# Altium PCB ESP32_Projet.PcbDoc (part 1 of 2)
Units mm, origin at the board's own origin, x right, y up, seen from the top; angles counter-clockwise.
Board outline 70 x 50 mm, 4 copper layers (Top Layer 1, GND, VCC, Bottom Layer 1), stack 1.573 mm thick; 93 components, 75 nets, 367 pads, 172 vias.
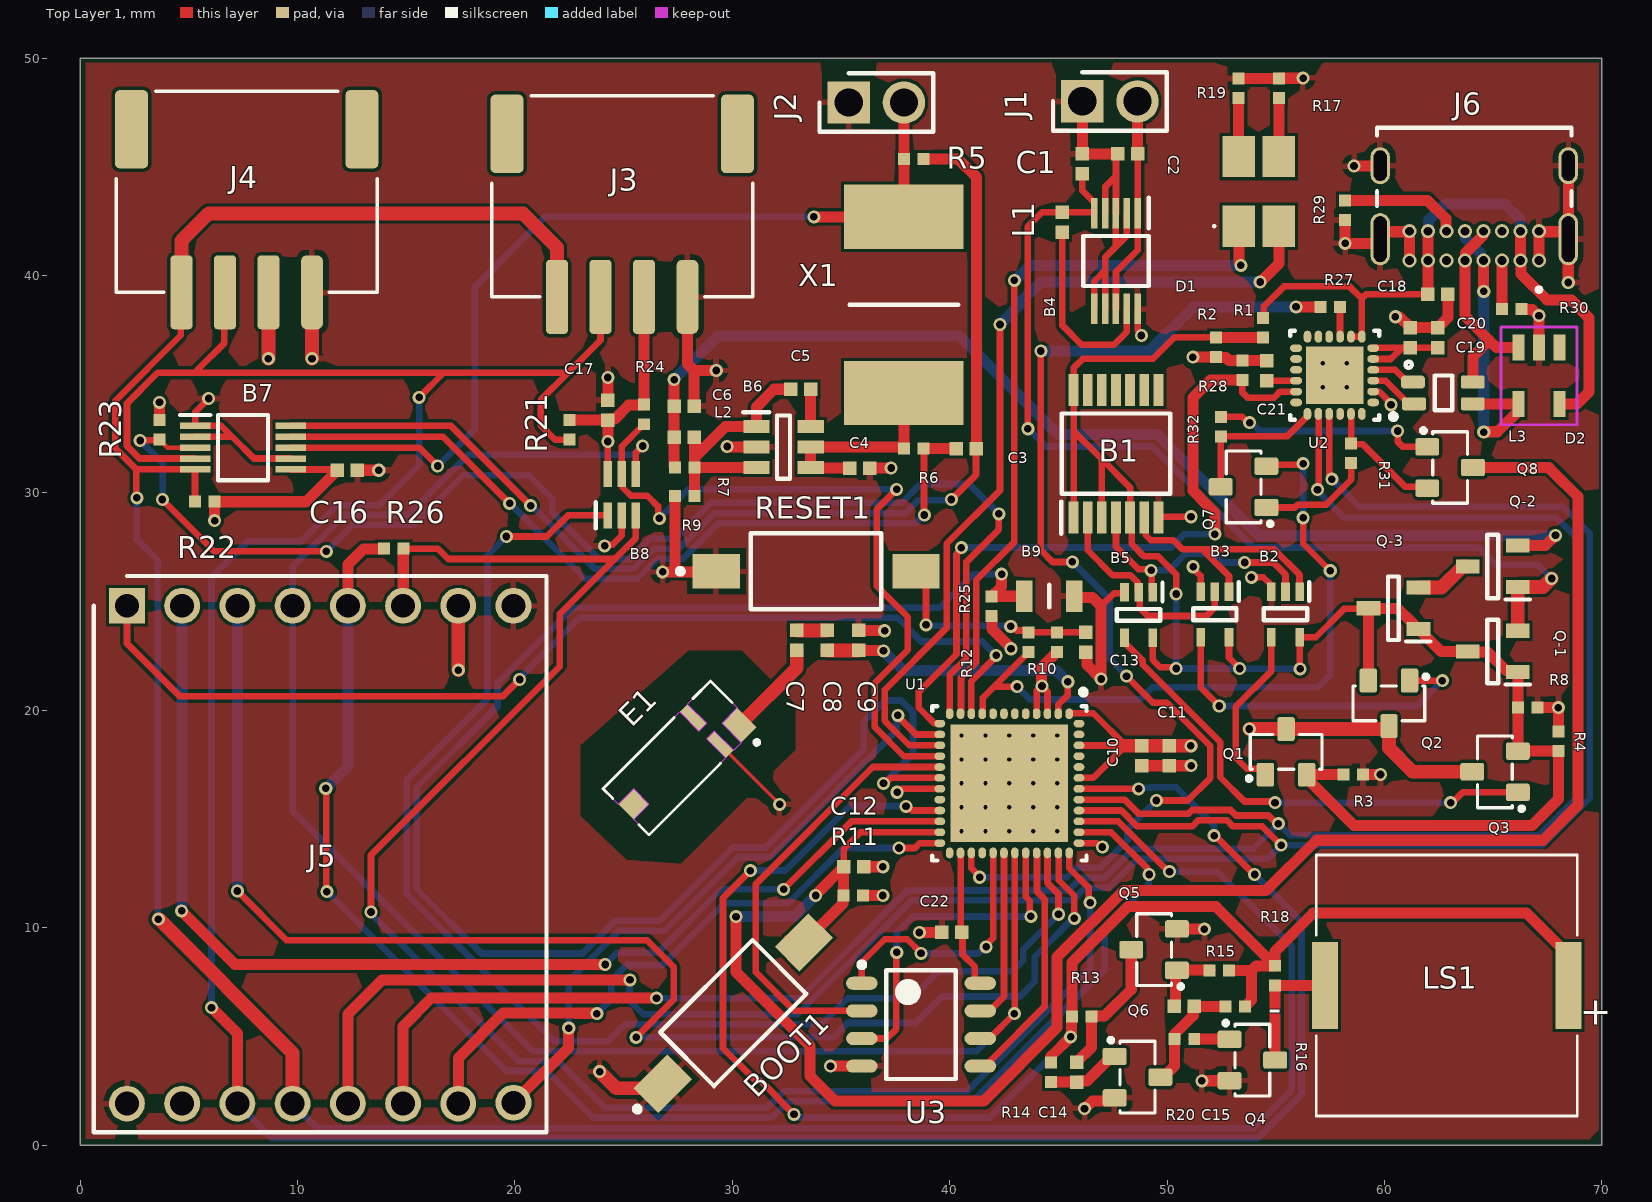
[diagram p0: Top Layer 1 view]
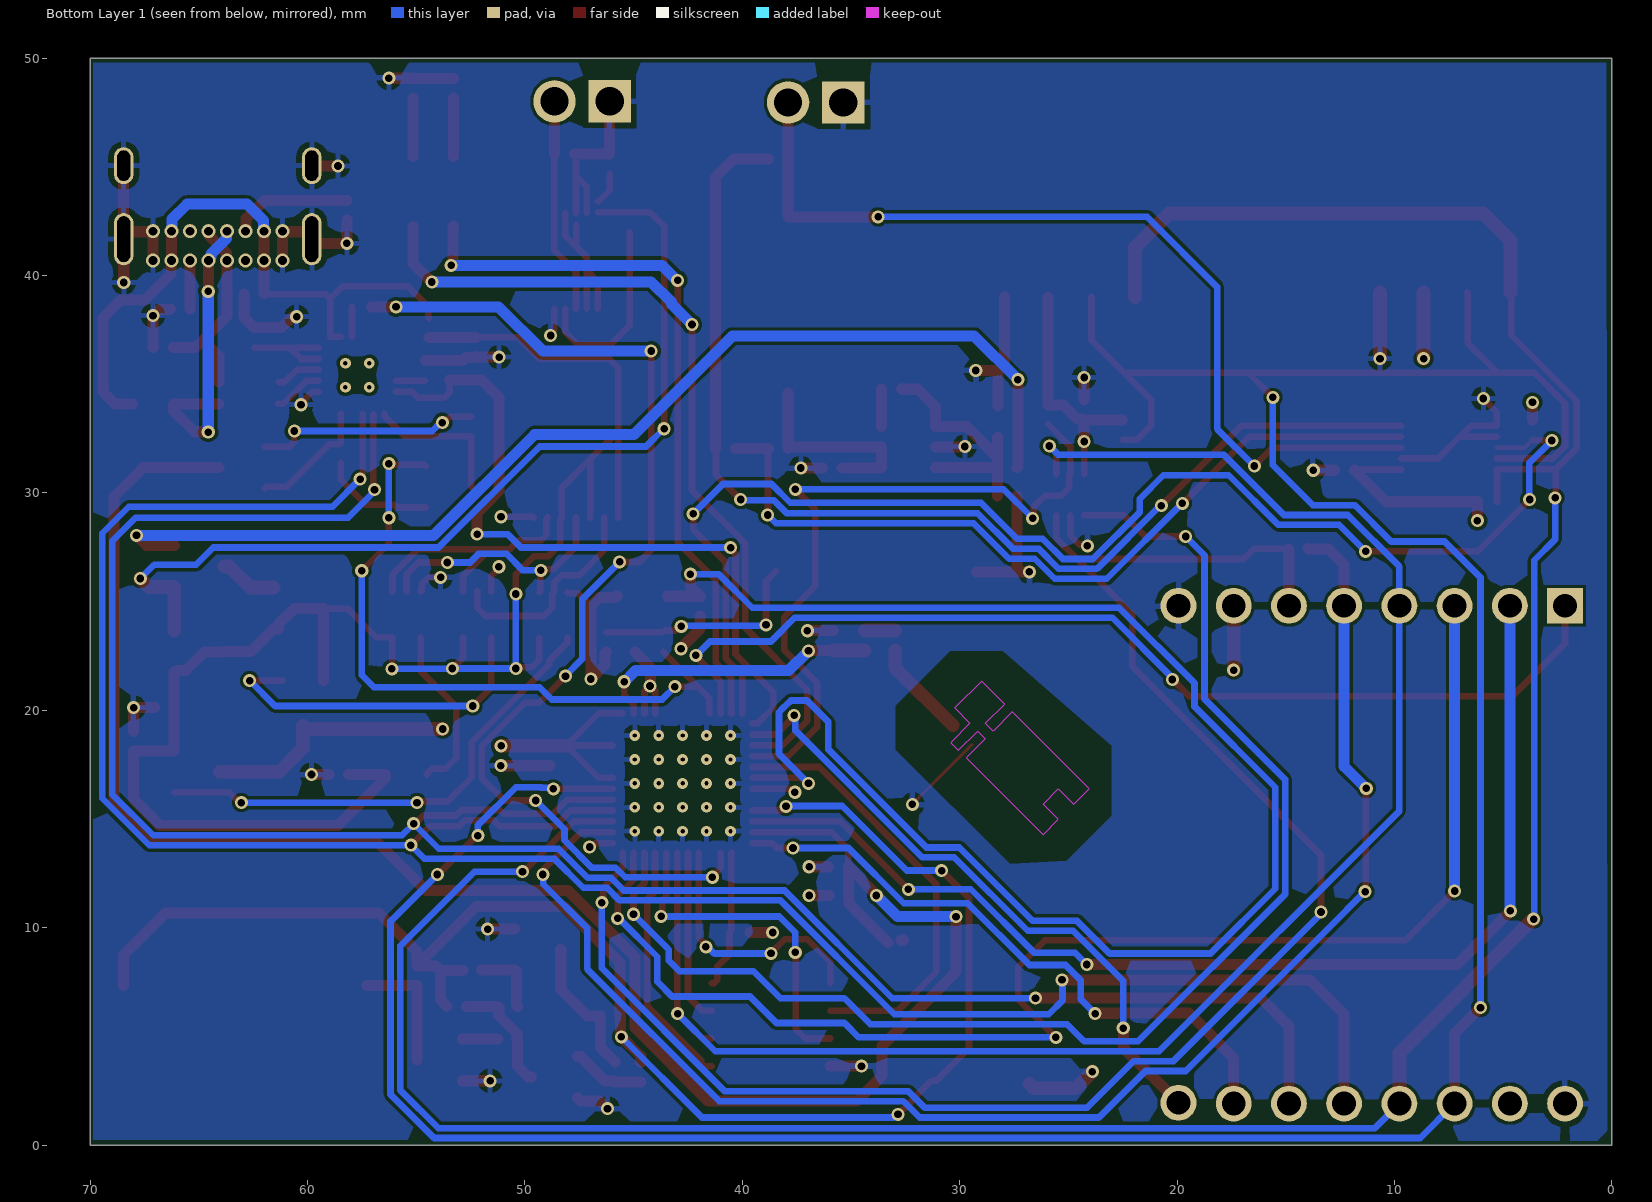
[diagram p1: Bottom Layer 1 view, seen from below]
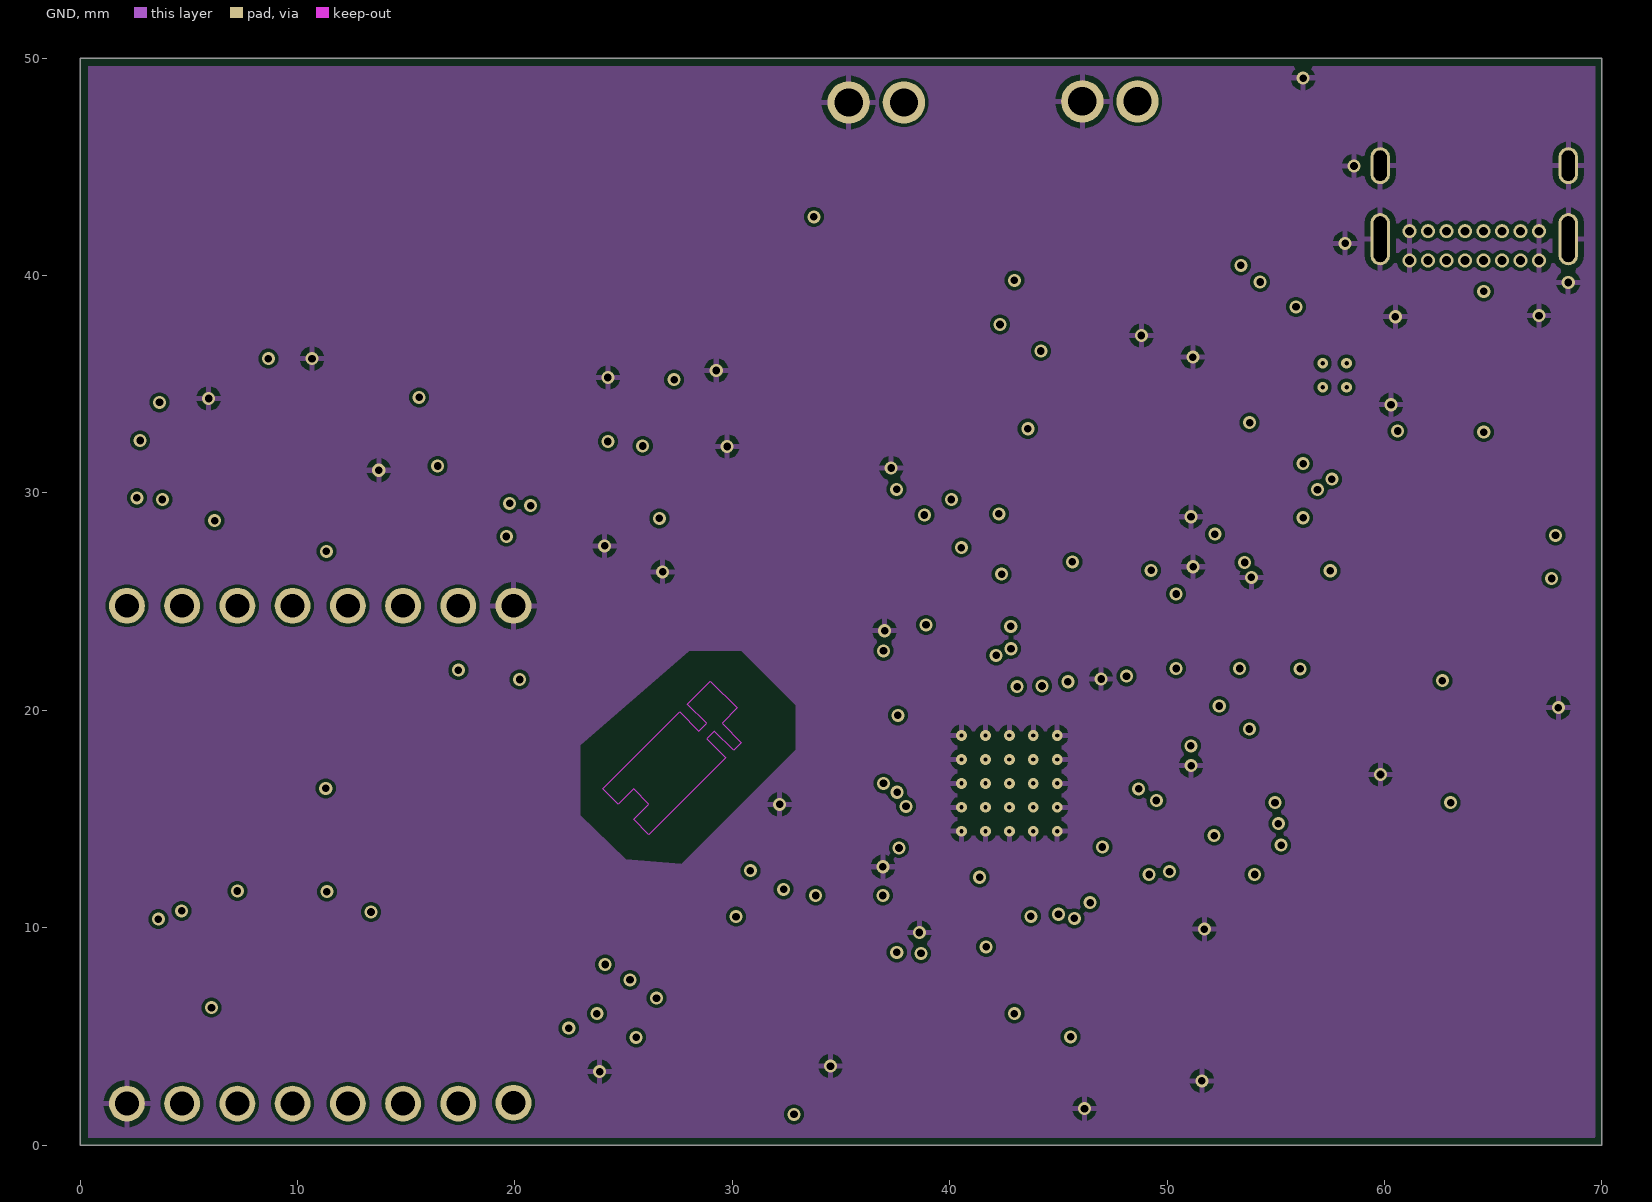
[diagram p2: GND]
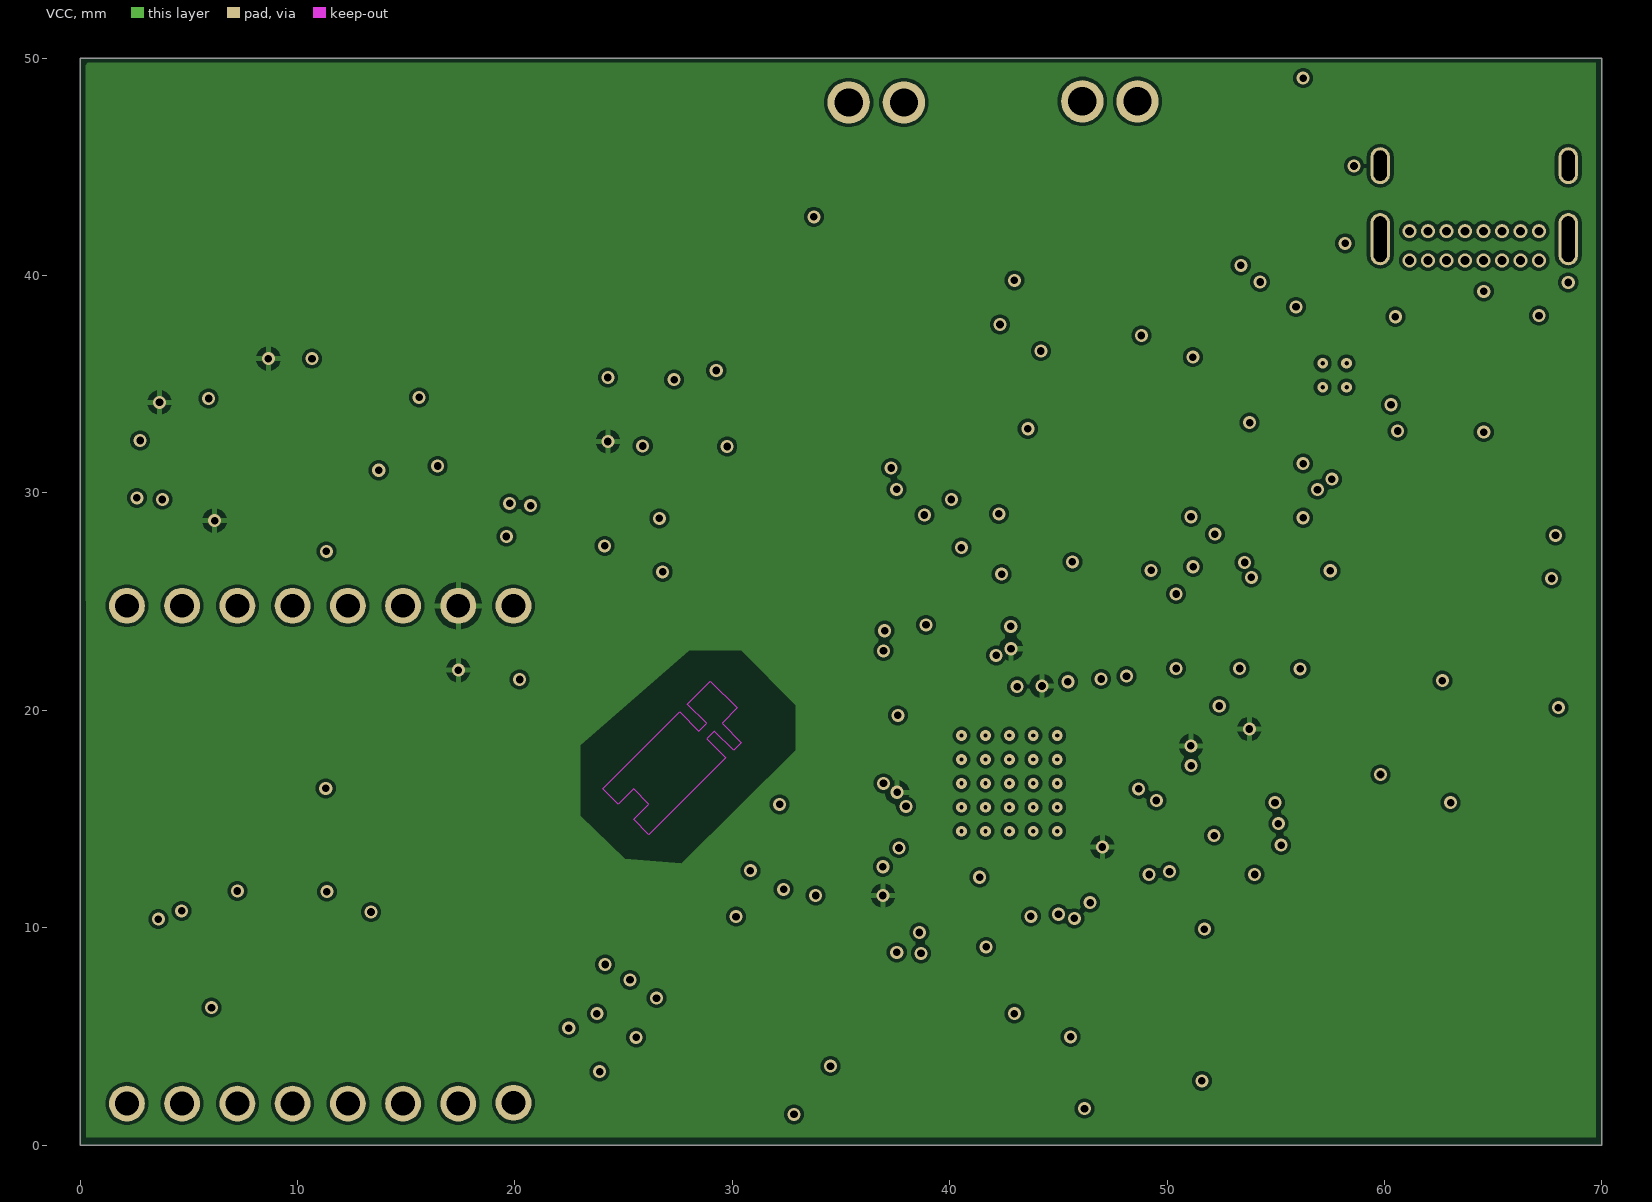
[diagram p3: VCC]

## Layer stack, top to bottom
Top Solder: solder mask 0.0102, Solder Resist, Dk 3.5
Top Layer 1: signal copper 0.035
Dielectric 4: prepreg 0.1803, PP-021, Dk 4.7
Dielectric 2: prepreg 0.1803, PP-021, Dk 4.7
GND: signal copper 0.0356
Dielectric 1: core 0.711, Core-042, Dk 4.8
VCC: signal copper 0.0356
Dielectric 3: prepreg 0.1803, PP-021, Dk 4.7
Dielectric 5: prepreg 0.1803, PP-021, Dk 4.7
Bottom Layer 1: signal copper 0.035
Bottom Solder: solder mask 0.0102, Solder Resist, Dk 3.5

## Board outline
0,0 70,0 70,50 0,50

## Design rules (kind name [scope] priority, off if disabled: settings)
Clearance Clearance_OLTTTPPP [OnOutside] p1: gap=0.15 ignorepadtopadclearanceinfootprint=TRUE
Clearance Clearance_ILTTTPPP [All] p2: gap=0.15 ignorepadtopadclearanceinfootprint=TRUE except(0.2: Arc-Hole Track-Hole SMDPad-Hole THPad-Hole Via-Hole Fill-Hole Poly-Hole Region-Hole)
HoleSize HoleSize_2 [InComponent('U2')] p1: absolutevalues=TRUE maxlimit=1000 minlimit=0.2 maxpercent=80.000 minpercent=20.000
HoleSize HoleSize_1 [InComponent('U1')] p2: absolutevalues=TRUE maxlimit=1000 minlimit=0.2 maxpercent=80.000 minpercent=20.000
HoleSize [All] p3: absolutevalues=TRUE maxlimit=1000 minlimit=0.25 maxpercent=80.000 minpercent=20.000
HoleToHoleClearance HoleToHoleClearance_uVia_same_layer_inner [IsMicroVia and ((StartLayer = 'Inner 1') and (StopLayer = 'Inner 2')) vs IsMicroVia and ((StartLayer = 'Inner 1') and (StopLayer = 'Inner 2'))] p1: gap=0.1 allowstackedmicrovias=FALSE
HoleToHoleClearance HoleToHoleClearance_uVia_same_layer_top [IsMicroVia and ((StartLayer = 'Top Layer') and (StopLayer = 'Inner 1')) vs IsMicroVia and ((StartLayer = 'Top Layer') and (StopLayer = 'Inner 1'))] p2: gap=0.1 allowstackedmicrovias=FALSE
HoleToHoleClearance HoleToHoleClearance_uVia [IsMicroVia vs IsMicroVia] p3: gap=0.01 allowstackedmicrovias=FALSE
HoleToHoleClearance [All] p4: gap=0.1 allowstackedmicrovias=FALSE
MinimumAnnularRing MinimumAnnularRing_uVia [IsMicroVia] p1: minimumring=0.09
MinimumAnnularRing MinimumAnnularRing_OAR [OnOutside] p2: minimumring=0.125
MinimumAnnularRing MinimumAnnularRing_IAR [All] p3: minimumring=0.125
MinimumSolderMaskSliver [All] p1: minsoldermaskwidth=0.051
PolygonConnect [All] p1: connectstyle=Relief reliefconductorwidth=0.254 reliefentries=4 polygonreliefangle="90 Angle" airgapwidth=0.254
RoutingVias RoutingVias_1 [InComponent('U1')] p1: holewidth=0.5 width=1 viastyle="Through Hole" minholewidth=0.5 minwidth=1 maxholewidth=50 maxwidth=60
RoutingVias RoutingVias_uVia [All] p2: holewidth=0.1 width=0.28 viastyle="Through Hole" minholewidth=0.1 minwidth=0.28 maxholewidth=0.1 maxwidth=0.28
RoutingVias [All] p3: holewidth=0.35 width=0.6 viastyle="Through Hole" minholewidth=0.1 minwidth=0.28 maxholewidth=3 maxwidth=3.25
SilkToSilkClearance [InComponent('U1')] p1: silktosilkclearance=0.254
SilkToSolderMaskClearance [IsText vs InComponent('U1')] p1: minsilkscreentomaskgap=0.254 clearancetoexposedcopper=TRUE
SolderMaskExpansion [All] p1: expansion=0 istentingtop=FALSE
SupplyNets "Schematic Supply Nets_2" [InNet('GND')] p1: voltage=0.000
SupplyNets "Schematic Supply Nets_1" [InNet('VBUS')] p2: voltage=0.000
SupplyNets "Schematic Supply Nets" [InNet('3V3')] p3: voltage=0.000
ViasUnderSMD [IsMicroVia] p1: allowed=TRUE
Width Width_ILTW [All] p1: maxlimit=3 minlimit=0.15 preferedwidth=0.15
25 further rules are at their usual default settings.

## Classes and differential pairs
component class UART: C18 C19 C20 C21 D2 J6 L3 Q7 Q8 R27 R28 R29 R30 R31 R32 U2
component class SPI: B8 B9 C17 R24 R25 R26
component class I2C: B7 C16 J3 J4 R21 R22 R23
component class HIM: BOOT1 C12 C13 C14 C15 D1 LS1 Q4 Q5 Q6 R10 R11 R12 R13 R14 R15 R16 R17 R18 R19 R20 RESET1
component class ESP: C10 C11 C22 U1
component class ANTENNE: C7 C8 C9 E1
component class ALIM_MOSFET: B1 B2 B3 B4 B5 B6 C1 C2 C3 C4 C5 C6 J1 J2 L1 L2 Q1 Q2 Q3 Q-1 Q-3 R1 R2 R3 R4 R5 R6 R7 R8 R9 X1

## Components (designator, comment, footprint, x,y, rotation, side; value= is the part's Value field where it differs from the comment)
B1 "74VHC05FT" SOP65P640X120-14N 47.65,31.801 r90 top
B2 "MC74VHC1GT08DFT2G" SOT65P210X110-5N 55.448,24.409 r270 top
B3 "MC74VHC1GT08DFT2G" SOT65P210X110-5N 52.197,24.409 r270 top
B4 "TPS62056DGSG4" SOP50P490X110-10N 47.65,40.665 r270 top
B5 "MC74VHC1GT08DFT2G" SOT65P210X110-5N 48.692,24.384 r270 top
B6 "LMR50410Y3FQDBVRQ1" SOT95P280X145-6N 32.36,32.106 r0 top
B7 "INA237AIDGST" SOP50P490X110-10N 7.497,32.077 r0 top
B8 "TMP126DCKR" SOT65P210X110-6N 24.917,29.911 r90 top
B9 "NB12K00103JBB" RESC2212X50N 44.588,25.248 r0 top
BOOT1 "FSMSM" TECO-FSMSM-2_V 30.048,6.071 r45 top
C1 "22uF" CAPC1005X06N 46.101,45.136 r90 top
C2 "2,2uF" CAPC1005X06N 48.184,45.593 r180 top
C3 "50uF" CAPC1005X06N 40.767,32.029 r180 top
C4 "2,2uF" CAPC1005X06N 35.865,31.14 r0 top
C5 "0,1uF" CAPC1005X06N 33.147,34.773 r0 top
C6 "10uF" CAPC1005X06N 27.788,33.985 r0 top
C7 "0,9pF" CAPC1005X06N 32.971,23.211 r90 top
C8 "0,6pF" CAPC1005X06N 34.368,23.214 r270 top
C9 "1pF" CAPC1005X06N 35.815,23.211 r270 top
C10 "10uF/6.3V(10%)" CAPC1005X06N 48.844,17.91 r90 top
C11 "0.1uF/6.3V(10%)" CAPC1005X06N 50.103,17.903 r90 top
C12 "1uF" CAPC1005X06N 35.585,12.802 r0 top
C13 "1uF" CAPC1005X06N 46.253,23.132 r270 top
C14 "0.01µF" CAPC1005X06N 45.847,3.353 r270 top
C15 "0.01µF" CAPC1005X06N 50.8,6.375 r0 top
C16 "100nF" CAPC1005X06N 12.294,31.039 r0 top
C17 "0.1µF" CAPC1005X06N 24.282,33.807 r90 top
C18 "1.5uF" CAPC1005X06N 61.189,37.135 r90 top
C19 "0.1uF" CAPC1005X06N 62.459,37.135 r90 top
C20 "1uF" CAPC1005X06N 62.459,39.141 r0 top
C21 "4.7uF" CAPC1005X06N 54.585,35.611 r90 top
C22 "100nF" CAPC1005X06N 40.107,9.779 r180 top (schematic designator C?)
D1 "598-8610-207F" 5988610207F 54.218,43.866 r90 top
D2 "824011" 824011 67.107,35.382 r180 top
E1 "NN03-320" XCVR_NN03-320 27.584,17.805 r45 top
J1 "61300211121" 61300211121 46.101,48.006 r0 top
J2 "61300211121" 61300211121 35.357,47.955 r0 top
J3 "114020164" 114020164 24.94,42.814 r180 top
J4 "114020164" 114020164 7.668,43.024 r180 top
J5 "825433-8" Connect-Mikrobus 2.159,24.805 r0 top
J6 "Use" USB4085-GF-A 64.13,45.047 r180 top
L1 "10uF" LQPC1005X06N 42.393,45.24 r90 top
L2 "3,3uH" LQPC1005X06N 24.991,29.769 r180 top
L3 "Filtre en mode commun" 744232090 62.713,34.595 r0 top (schematic designator L?)
LS1 "PKLCS1212E40A1-R1" SPKR_PKLCS1212E40A1-R1 62.865,7.341 r180 top
Q1 "BSS123" BSS123 55.474,18.085 r0 top
Q2 "BSS123" BSS123 60.207,20.32 r180 top
Q3 "BSS123" BSS123 65.083,17.17 r90 top
Q4 "SS8050-G" SS8050-G 53.924,3.912 r270 top
Q5 "SS8050-G" SS8050-G 49.403,8.992 r90 top
Q6 "SS8050-G" SS8050-G 48.641,3.124 r270 top
Q7 "SS8050-G" SS8050-G 53.518,30.277 r90 top
Q8 "SS8050-G" SS8050-G 63.017,31.166 r270 top
Q-1 "FDV304P" SOT95P251X112-3N 64.982,22.708 r180 top (schematic designator "Q -1")
Q-2 "FDV304P" SOT95P251X112-3N 64.982,26.619 r180 top (schematic designator "Q -2")
Q-3 "FDV304P" SOT95P251X112-3N 60.41,24.689 r180 top (schematic designator "Q -3")
R1 "2K" RESC1005X06N 54.407,37.592 r270 top
R2 "1K" RESC1005X06N 52.248,36.703 r270 top
R3 "10K" RESC1005X06N 58.572,17.043 r0 top
R4 "10K" RESC1005X06N 67.996,18.567 r90 top
R5 "50ohm" RESC1005X06N 38.354,45.364 r0 top
R6 "50ohm" RESC1005X06N 38.354,32.029 r0 top
R7 "10K" RESC1005X06N 27.813,31.166 r0 top
R8 "10K" RESC1005X06N 66.582,20.117 r0 top
R9 "90K" RESC1005X06N 27.813,29.845 r180 top
R10 "10kΩ" RESC1005X06N 44.933,23.132 r270 top
R11 "10kΩ" RESC1005X06N 35.56,11.481 r0 top
R12 "0Ω" RESC1005X06N 43.637,23.132 r270 top
R13 "510Ω" RESC1005X06N 46.076,5.918 r180 top
R14 "20kΩ" RESC1005X06N 44.653,3.353 r90 top
R15 "20kΩ" RESC1005X06N 52.4,8.026 r0 top
R16 "510Ω" RESC1005X06N 53.137,6.375 r0 top
R17 "150Ω" RESC1005X06N 55.143,48.616 r270 top
R18 "1kΩ" RESC1005X06N 54.966,7.798 r90 top
R19 "150Ω" RESC1005X06N 53.289,48.616 r270 top
R20 "1kΩ" RESC1005X06N 50.8,4.877 r0 top
R21 "2kΩ" RESC1005X06N 22.504,32.893 r270 top
R22 "2kΩ" RESC1005X06N 5.74,29.591 r180 top
R23 "10kΩ" RESC1005X06N 3.658,32.893 r270 top
R24 "10kΩ" RESC1005X06N 25.933,33.604 r90 top
R25 "10kΩ" RESC1005X06N 41.935,24.79 r90 top
R26 "10kΩ" RESC1005X06N 14.427,27.432 r180 top
R27 "4.7k" RESC1005X06N 57.506,38.557 r0 top
R28 "10k" RESC1005X06N 53.467,35.636 r90 top
R29 "5.1k" RESC1005X06N 58.191,43.002 r270 top
R30 "5.1k" RESC1005X06N 65.862,38.456 r0 top
R31 "10k" RESC1005X06N 58.471,31.826 r270 top
R32 "10k" RESC1005X06N 52.476,33.045 r90 top
RESET1 "FSMSM" TECO-FSMSM-2_V 33.858,26.391 r0 top
U1 "ESP32-PICO-D4" PQFN50P700X700X104_HS-49N 42.748,16.637 r270 top
U2 "CP2104-F03-GM" PQFN50P400X400X80_HS-25N 57.709,35.408 r180 top
U3 "IS66WVS1M8BLL-104NLI" SOIC127P600X175-8N 38.684,5.537 r0 top (schematic designator U?)
X1 "PSR400ITQFF0L50" RESC10052X200N 37.897,38.647 r270 top

## Footprints (in the part's own frame and the unit in brackets; to place one, negate y for a bottom-side part, rotate by r counter-clockwise, add the part's x,y. Pads: shape width x height; smd on the part's side, far side on the other; paste and mask are expansions set on the pad)
824011 [mil] "Suppresseurs ESD / diodes TVS WE-TVS High Speed 5uA 5VDC 2+1"
  rect 21.65x47.24 smd: 1(-37.4,-51.18) 2(0,-51.18) 3(37.4,-51.18) 4(37.4,51.18) 5(-37.5,51)
  Top Layer 1 keep-out lines w5: 68.9,88.58 -68.9,88.58 -68.9,-88.58 68.9,-88.58 68.9,88.58
  body extent -57,-55 57,55, height 57
114020164 [mm]
  rrect50% 1x3.4 smd: 1(-3,3.8)
  rrect30% 1x3.4 smd: 2(-1,3.8) 3(1,3.8) 4(3,3.8)
  rrect26% 1.5x3.6 smd: MP1(-5.3,-3.7) MP2(5.3,-3.7)
  silkscreen extent -6,-5.45 6,3.8, body extent -6.1,-5.59 5.9,4.59, height 5.2
744232090 [mm]
  rrect50% 1.1x0.6 smd: 1(-1.4,0.5)
  rrect33% 1.1x0.6 smd: 2(1.35,0.5) 3(1.35,-0.5) 4(-1.35,-0.5)
  silkscreen extent -1.74,-0.8 0.4,1.44, body extent -1.6,-0.8 1.6,0.8, height 1.8
5988610207F [mm]
  rect 1.9x1.5 smd: 1(-1.6,0.925) 2(1.6,0.925) 3(-1.6,-0.925) 4(1.6,-0.925)
  silkscreen extent -1.65,2 -1.55,2.1, body extent -1.6,-1.35 1.6,1.35, height 0.9
61300211121 [mm] "Embases et logements de câbles WR-PHD 2.54mm 2Pin T HT Header"
  rect 1.95x1.95 / inner round 1.95 / far side rect 1.95x1.95 hole 1.3: 1(0,0)
  round 1.95 hole 1.3: 2(2.54,0)
  silkscreen extent -1.35,-1.35 3.89,1.35
BSS123 [mm]
  rrect25% 0.8x1.1 smd paste+0 mask+0.075: 1(-0.95,-1.05) 2(0.95,-1.05) 3(0,1.05)
  silkscreen extent -1.77,-1.3 1.65,0.8, body extent -1.5,-1.3 1.5,1.3, height 1.1
CAPC1005X06N [mm] "Chip Capacitor, 2-Leads, Body 1,00x0,50mm, IPC Medium Density"
  rect 0.62x0.62 smd: 1(-0.46,0) 2(0.46,0)
  body extent -0.53,-0.28 0.53,0.28, height 0.55
Connect-Mikrobus [mm]
  rect 1.65x1.65 / inner round 1.65 / far side rect 1.65x1.65 hole 1.1: 1(0,0)
  round 1.65 hole 1.1: 2(2.54,0) 3(5.08,0) 4(7.62,0) 5(10.16,0) 6(12.7,0) 7(15.24,0) 8(17.78,0) 9(17.78,-22.86) 10(15.24,-22.9) 11(12.7,-22.9) 12(10.16,-22.9) 13(7.62,-22.9) 14(5.08,-22.9) 15(2.54,-22.9) 16(0,-22.9)
  silkscreen extent -1.52,-24.22 19.3,1.37, body extent -1.37,-24.18 19.14,1.28, height 6.7
LQPC1005X06N [mm]
  rect 0.62x0.62 smd: 1(-3.254,-2.794) 2(-2.334,-2.794)
  body extent -3.32,-3.07 -2.27,-2.52, height 0.55
PQFN50P400X400X80_HS-25N [mm] "PQFN, 24-Leads, Body 4,00x4,00mm, Pitch 0,50mm, Thermal Pad 2,65x2,65mm, IPC Medium Density"
  oval 0.55x0.35 smd: 1(-1.775,1.25) 2(-1.775,0.75) 3(-1.775,0.25) 4(-1.775,-0.25) 5(-1.775,-0.75) 6(-1.775,-1.25) 13(1.775,-1.25) 14(1.775,-0.75) 15(1.775,-0.25) 16(1.775,0.25) 17(1.775,0.75) 18(1.775,1.25)
  oval 0.35x0.55 smd: 7(-1.25,-1.775) 8(-0.75,-1.775) 9(-0.25,-1.775) 10(0.25,-1.775) 11(0.75,-1.775) 12(1.25,-1.775) 19(1.25,1.775) 20(0.75,1.775) 21(0.25,1.775) 22(-0.25,1.775) 23(-0.75,1.775) 24(-1.25,1.775)
  rect 2.65x2.65 smd: 25(0,0)
  silkscreen extent -2.83,-2.05 2.05,2.05, body extent -2.05,-2.05 2.05,2.05, height 0.8
PQFN50P700X700X104_HS-49N [mm] "PQFN, 48-Leads, Body 7,00x7,00mm, Pitch 0,50mm, Thermal Pad 5,40x5,40mm, IPC Medium Density"
  oval 0.5x0.35 smd: 1(-3.2,2.75) 2(-3.2,2.25) 3(-3.2,1.75) 4(-3.2,1.25) 5(-3.2,0.75) 6(-3.2,0.25) 7(-3.2,-0.25) 8(-3.2,-0.75) 9(-3.2,-1.25) 10(-3.2,-1.75) 11(-3.2,-2.25) 12(-3.2,-2.75) 25(3.2,-2.75) 26(3.2,-2.25) 27(3.2,-1.75) 28(3.2,-1.25) 29(3.2,-0.75) 30(3.2,-0.25) 31(3.2,0.25) 32(3.2,0.75) 33(3.2,1.25) 34(3.2,1.75) 35(3.2,2.25) 36(3.2,2.75)
  oval 0.35x0.5 smd: 13(-2.75,-3.2) 14(-2.25,-3.2) 15(-1.75,-3.2) 16(-1.25,-3.2) 17(-0.75,-3.2) 18(-0.25,-3.2) 19(0.25,-3.2) 20(0.75,-3.2) 21(1.25,-3.2) 22(1.75,-3.2) 23(2.25,-3.2) 24(2.75,-3.2) 37(2.75,3.2) 38(2.25,3.2) 39(1.75,3.2) 40(1.25,3.2) 41(0.75,3.2) 42(0.25,3.2) 43(-0.25,3.2) 44(-0.75,3.2) 45(-1.25,3.2) 46(-1.75,3.2) 47(-2.25,3.2) 48(-2.75,3.2)
  rect 5.4x5.4 smd: 49(0,0)
  silkscreen extent -4.32,-3.55 3.55,3.55, body extent -3.55,-3.55 3.55,3.55, height 1.04
RESC1005X06N [mm] "Chip Resistor, 2-Leads, Body 1,00x0,50mm, IPC Medium Density"
  rect 0.55x0.55 smd: 1(-0.45,0) 2(0.45,0)
  body extent -0.53,-0.28 0.53,0.28, height 0.55
RESC2212X50N [mm]
  rect 0.75x1.45 smd: 1(-1.15,0) 2(1.15,0)
  silkscreen extent 0,-0.53 0,0.53, body extent -1.07,-0.63 1.07,0.63, height 0.5
RESC10052X200N [mm]
  rect 2.95x5.5 smd: 1(-4.05,0) 2(4.05,0)
  silkscreen extent 0,-2.5 0,2.5, body extent -5,-2.6 5,2.6, height 2
SOIC127P600X175-8N [mm] "SOIC, 8-Leads, Body 4,90x3,90mm, Pitch 1,27mm, IPC Medium Density"
  oval 1.45x0.6 smd: 1(-2.725,1.905) 2(-2.725,0.635) 3(-2.725,-0.635) 4(-2.725,-1.905) 5(2.725,-1.905) 6(2.725,-0.635) 7(2.725,0.635) 8(2.725,1.905)
  silkscreen extent -2.85,-2.5 1.6,2.88, body extent -3,-2.5 3,2.5, height 1.75
SOP50P490X110-10N [mm]
  rect 1.4x0.3 smd: 1(-2.2,1) 2(-2.2,0.5) 3(-2.2,0) 4(-2.2,-0.5) 5(-2.2,-1) 6(2.2,-1) 7(2.2,-0.5) 8(2.2,0) 9(2.2,0.5) 10(2.2,1)
  silkscreen extent -2.9,-1.5 1.15,1.5, body extent -2.46,-1.5 2.46,1.5, height 1.06
SOP65P640X120-14N [mm]
  rect 1.475x0.45 smd: 1(-2.938,1.95) 2(-2.938,1.3) 3(-2.938,0.65) 4(-2.938,0) 5(-2.938,-0.65) 6(-2.938,-1.3) 7(-2.938,-1.95) 8(2.938,-1.95) 9(2.938,-1.3) 10(2.938,-0.65) 11(2.938,0) 12(2.938,0.65) 13(2.938,1.3) 14(2.938,1.95)
  silkscreen extent -3.67,-2.5 1.85,2.52, body extent -3.1,-2.75 3.3,2.75, height 1.1
SOT65P210X110-5N [mm]
  rect 0.85x0.4 smd: 1(-1.05,0.65) 2(-1.05,0) 3(-1.05,-0.65) 4(1.05,-0.65) 5(1.05,0.65)
  silkscreen extent -1.48,-1 0.28,1.1, body extent -0.95,-1 1.15,1, height 1.1
SOT65P210X110-6N [mm]
  rect 1.2x0.4 smd: 1(-0.95,0.65) 2(-0.95,0) 3(-0.95,-0.65) 4(0.95,-0.65) 5(0.95,0) 6(0.95,0.65)
  silkscreen extent -1.55,1.2 -0.35,1.2, body extent -1.05,-1 1.05,1, height 1
SOT95P251X112-3N [mm]
  rect 1.1x0.65 smd: 1(-1.15,0.95) 2(-1.15,-0.95) 3(1.15,0)
  silkscreen extent -1.7,-1.46 0.25,1.53, body extent -1.25,-1.46 1.25,1.46, height 1.12
SOT95P280X145-6N [mm]
  rect 1.2x0.6 smd: 1(-1.25,0.95) 2(-1.25,0) 3(-1.25,-0.95) 4(1.25,-0.95) 5(1.25,0) 6(1.25,0.95)
  silkscreen extent -1.85,-1.45 0.3,1.6, body extent -1.4,-1.45 1.4,1.45, height 1.2
SPKR_PKLCS1212E40A1-R1 [mm]
  rect 1.2x4 smd: N(5.6,0) P(-5.6,0)
  silkscreen extent -6,-6 6,6, body extent -6,-6 6,6, height 3
SS8050-G [mm]
  rrect25% 0.8x1.1 smd paste+0 mask+0.075: 1(-0.95,-1.05) 2(0.95,-1.05) 3(0,1.05)
  silkscreen extent -1.77,-1.3 1.65,0.8, body extent -1.5,-1.3 1.5,1.3, height 1.1
TECO-FSMSM-2_V [mm] "SMD, 2-Leads, Body 6x3.5mm, Pitch 9.19mm"
  rect 2.2x1.6 smd: 1(-4.595,0)
  rect 2.18x1.6 smd: 2(4.595,0)
  silkscreen extent -6.37,-1.75 3,1.75, body extent -4.98,-1.75 4.98,1.75, height 4.4
USB4085-GF-A [mm]
  round 0.65 hole 0.4: A1(-2.975,4.36) A4(-2.125,4.36) A5(-1.275,4.36) A6(-0.425,4.36) A7(0.425,4.36) A8(1.275,4.36) A9(2.125,4.36) A12(2.975,4.36) B1(2.975,3.01) B4(2.125,3.01) B5(1.275,3.01) B6(0.425,3.01) B7(-0.425,3.01) B8(-1.275,3.01) B9(-2.125,3.01) B12(-2.975,3.01)
  oval 0.9x1.7 hole 0.6 slot 1.4 at 90 deg: S1(-4.325,0) S2(4.325,0)
  oval 0.9x2.4 hole 0.6 slot 2.1 at 90 deg: S3(-4.325,3.38) S4(4.325,3.38)
  silkscreen extent -4.47,-1.74 4.47,5.8, body extent -4.47,-4.25 4.47,4.92, height 3.46
XCVR_NN03-320 [mm]
  rect 1x1 smd: 1(-3,0)
  rect 0.5x1.25 smd: 2(1.75,-0.875) 4(1.75,0.875)
  rect 1x1.25 smd: 3(3,-0.875)
  Keep-Out Layer region: 3.5,-0.25 2.5,-0.25 2.5,-1.5 2,-1.5 2,-0.25 1.5,-0.25 1.5,-1.5 -3.5,-1.5 -3.5,-0.5 -2.5,-0.5 -2.5,0.5 -3.5,0.5 -3.5,1.5 1.5,1.5 1.5,0.25 2,0.25 2,1.5 3.5,1.5
  silkscreen extent -3.5,-2.1 3.5,1.5, body extent -3.5,-1.5 3.5,1.5, height 2.02

## Part data
B1: "Logic Gates CMOS LOGIC IC INVERTER", Manufacturer_Name=Toshiba, Mouser Part Number=757-74VHC05FT, Manufacturer_Part_Number=74VHC05FT
B2 B3 B5: "Single 2-Input AND Gate, TTL Level", Manufacturer_Name=onsemi, Manufacturer_Part_Number=MC74VHC1GT08DFT2G
B4: "TEXAS INSTRUMENTS - TPS62056DGSG4 - Synchronous Buck (Step Down) Switching Regulator, Fixed, 2.7V-10Vin, 3.3V/0.8A out, 850kHz, VSSOP-10", Manufacturer_Name="Texas Instruments", Mouser Part Number=595-TPS62056DGSG4, Manufacturer_Part_Number=TPS62056DGSG4
B6: "Régulateurs de tension de commutation Automotive qualified SIMPLE SWITCHER 4-V to 36-V, 1-A synchronous step-down converter 6-SOT-23 -40 to 150", Manufacturer_Name="Texas Instruments", Mouser Part Number=595-R50410Y3FQDBVRQ1, Manufacturer_Part_Number=LMR50410Y3FQDBVRQ1
B7: "Current Sense Amplifiers 85-V, 16-bit, I2C output current/voltage/power monitor with alert 10-VSSOP -40 to 125", Manufacturer_Name="Texas Instruments", Mouser Part Number=595-INA237AIDGST, Manufacturer_Part_Number=INA237AIDGST
B8: "Board Mount Temperature Sensors +/-0.25 C SPI temperature sensor with 175 C operation, CRC and slew-rate alert", Manufacturer_Name="Texas Instruments", Mouser Part Number=595-TMP126DCKR, Manufacturer_Part_Number=TMP126DCKR
B9: "NTC SMD Thermistor, NB12K, 10K, 5% AVX 10k 0805 Protection NTC Thermistor, 5s, 2 x 1.25 x 1.3mm", Manufacturer_Name="Kyocera AVX", Mouser Part Number=581-NB12K00103JBB, Arrow Part Number=NB12K00103JBB, Arrow Price/Stock=https://www.arrow.com/en/products/nb12k00103jbb/avx, Datasheet Link=https://datasheet.datasheetarchive.com/originals/distributors/Datasheets-DGA6/551314.pdf, Geometry.Height=0.5mm, Manufacturer_Part_Number=NB12K00103JBB, Mouser Price/Stock=https://www.mouser.co.uk/ProductDetail/AVX/NB12K00103JBB/?qs=4%252B6%252BTdINQeDPvI%252BQUQjJ3Q%3D%3D
BOOT1 RESET1: library part CMP-2000-07511-1, "FSMSM Push Button Switch, 50 mA, -35 to 85 degC, 2-Pin SMD, RoHS, Bulk", Case\/Package=SMD/SMT, Contact Current Rating=50mA, Contact Resistance=100mOhm, Manufacturer="TE Connectivity", Max Operating Temperature=85degC, Max Voltage Rating (DC)=12V, Min Operating Temperature=-35degC, Operating Force=180gf, Package Description="2-Pin Surface Mount Device, Body 6 x 3.5 mm, Pitch 9.19 mm", Package Quantity=1000, Voltage Rating (DC)=24V, Actuator Length=1.07mm, Actuator Material=Polyamide, Contact Material=Brass, Contact Plating=Silver, Current Rating=50mA, Datasheet URL=http://www.te.com/commerce/DocumentDelivery/DDEController?Action=showdoc&DocId=Customer+Drawing%7F1437566-3%7FC2%7Fpdf%7FEnglish%7FENG_CD_1437566-3_C2_1437566_3_1_c.dwg.pdf%7F1437566-3, Datasheet Version="Rev. C2, 08/2014", Electrical Life=20000Cycles, ELV=Compliant, Illumination Type=Illuminated, Lead Free=LeadFree, Manufacturer URL=http://www.te.com/, Mechanical Life=20000Cycles, Mount=SurfaceMount, Mounting Technology=SurfaceMount, Orientation=Straight, Package Reference=FSMSM, Packaging=LoosePiece, REACH SVHC=Unknown, RoHSCompliant=true, Switch Travel=0.25mm, Termination=GullWing, Throw Configuration=SPST
C1 C2 C3 C4 C5 C6 C7 C8 C9 C10 C11 C12 C13 C14 C15 C16 C17 C18 C19 C20 C21 C22: library part Capacitor
D1: "Standard LEDs - SMD Red/Green WC 80/50mcd 645/570nm", Manufacturer_Name=Dialight, Mouser Part Number=645-598-8610-207F, Arrow Part Number=598-8610-207F, Arrow Price/Stock=https://www.arrow.com/en/products/598-8610-207f/dialight?region=nac, Datasheet Link=https://media.digikey.com/pdf/Data%20Sheets/Dialight%20PDFs/598%20Series%201210%20Pkg%20Bi-Color.pdf, Geometry.Height=0.8mm, Manufacturer_Part_Number=598-8610-207F, Mouser Price/Stock=https://www.mouser.co.uk/ProductDetail/Dialight/598-8610-207F?qs=7JStj%2FjQ2SFuCjosqwklHQ%3D%3D
D2: "TVS Diode Array WE-TVS, High Speed Series  - Low capazity - No leakage current - Low clamping voltage - high ESD voltage protection  -- USB 1.0 - 2.0"
E1: "Dual port antenna booster for GNSS, Bluetooth, 5G and UWB (1561 - 1606MHz, 2400 - 2500MHz, 3400 - 3800MHz, 3100 - 4800MHz and 6000 - 10600 MHz), signal booster", Manufacturer_Name=Ignion, Mouser Part Number=128-NN03-320, Manufacturer_Part_Number=NN03-320
J1 J2: "WURTH ELEKTRONIK - 61300211121 - HEADER, 2.54MM, PIN, THT, VERTICAL, 2WAY"
J3 J4: "Seeed Studio Accessories Grove Female Header - SMD-4P-2.0mm-90D-20Pcs", Manufacturer_Name="Seeed Studio", Mouser Part Number=713-114020164, Manufacturer_Part_Number=114020164
J5: library part Connect-Mikrobus, "Headers & Wire Housings 8P double for connection mikrobus", Manufacturer_Name="TE Connectivity", Mouser Part Number=571-825433-8, Manufacturer_Part_Number=825433-8
J6: library part USB4085-GF-A, "Connecteurs USB USB Type C, 2.0, Rec, TH , G/F, RA , Top Mnt, T & R"
L1 L2: library part Bobine
L3: library part 744232090, "Bobines / filtres en mode commun WE-CNSW 1206 370mA 90Ohm 100MHz AECQ200"
LS1: "Buzzers Transducer, Externally Driven Piezo 1.5V 2kHz 70dB @ 1.5V, 10cm Surface Mount Solder Pads", Package=None, Availability=Unavailable, MF="Murata Electronics", MP=PKLCS1212E40A1-R1, Price=None
Q1 Q2 Q3: "BSS123 N-Channel MOSFET, 170 mA, 100 V PowerTrench, 3-Pin SOT-23 ON Semiconductor"
Q4 Q5 Q6 Q7 Q8: "Bipolar Transistors - BJT NPN TRANSISTOR 1.5A 40V"
Q-1 Q-2 Q-3: "ON SEMICONDUCTOR - FDV304P - Power MOSFET, P Channel, 25 V, 460 mA, 1.22 ohm, SOT-23, Surface Mount", Manufacturer_Name=onsemi, Mouser Part Number=512-FDV304P, Arrow Part Number=FDV304P, Arrow Price/Stock=https://www.arrow.com/en/products/fdv304p/on-semiconductor?utm_currency=USD&region=europe, Datasheet Link=https://componentsearchengine.com/Datasheets/2/FDV304P.pdf, Geometry.Height=1.12mm, Manufacturer_Part_Number=FDV304P, Mouser Price/Stock=https://www.mouser.co.uk/ProductDetail/onsemi-Fairchild/FDV304P?qs=FOlmdCx%252BAA1BAlCQZu888w%3D%3D
R1 R2 R3 R4 R5 R6 R7 R8 R9 R10 R11 R12 R13 R14 R15 R16 R17 R18 R19 R20 R21 R22 R23 R24 R25 R26 R27 R28 R29 R30 R31 R32: library part Resistor
U1: library part ESP32, "Système RF sur puce - SoC SIP module ESP32 with 4MByte Flash, Dual Core MCU, Wi-Fi & Bluetooth Combo, LGA48-pin, 7*7mm", Manufacturer 1="Espressif Systems", Supplier Part Number 1=1904-1029-1-ND, Manufacturer Part Number 1=ESP32-PICO-D4, Supplier 1=Digi-Key
U2: library part USBBridge, "USB Bridge, USB to UART USB 2.0 UART Interface 24-QFN (4x4)", Manufacturer 1="Silicon Labs", Manufacturer Part Number 1=CP2104-F03-GM, Supplier 1="Arrow Electronics", Supplier Part Number 1=CP2104-F03-GM
U3: library part SRAM, "SRAM 8Mb, SerialRAM, 2.7V-3.6V, 104MHz, 8 pin SOIC 150 mil, RoHS", Manufacturer 1=ISSI, Supplier Part Number 1=706-IS66WVS1M8BLL-104NLI-ND, Manufactuer Part Number 1=IS66WVS1M8BLL-104NLI, Supplier 1=Digi-Key
X1: "ROHM - PSR400ITQFF0L50 - SMD Current Sense Resistor, 500 ohm, PSR Series, 3921 [1052 Metric], 4 W, +/- 1%, Metal Strip", Manufacturer_Name="ROHM Semiconductor", Mouser Part Number=755-PSR400ITQFF0L50, Datasheet Link=https://componentsearchengine.com/Datasheets/2/PSR400ITQFF0L50.pdf, Geometry.Height=2mm, Manufacturer_Part_Number=PSR400ITQFF0L50, Mouser Price/Stock=https://www.mouser.co.uk/ProductDetail/ROHM-Semiconductor/PSR400ITQFF0L50?qs=493kPxzlxfLaT1w5Mo%252BtHg%3D%3D

## Via types
v1: diameter 0.6, hole 0.35, Top Layer 1 to Bottom Layer 1, 143 vias
v2: diameter 0.5, hole 0.2, Top Layer 1 to Bottom Layer 1, 29 vias

## Nets (pads, with @x,y where several pads share a name; then routed paths per layer and width w, separated by ;. In a path a pad name is that pad's centre, name@x,y a point inside that pad or via, vN(x,y) a via of type N, cw(c..) or ccw(c..) an arc to the next point about the centre after c; other vN are vias at no path point)
3V3: B7.6 B8.6 C10.2 C11.2 C16.1 C17.1 J3.2 J4.2 J5.7 Q1.3 Q2.3 Q3.3 R10.2 R11.2 R21.1 R22.1 R23.1 R24.2 R25.1 U1.1 U1.3 U1.4 U1.19 U1.37 U1.43 U1.46 | length 61.2
  Top Layer 1 w0.305: B7.6@9.697,31.077 9.699,31.075 11.797,31.075 C16.1@11.834,31.039 ; B8.6@24.267,30.861 B8.6@24.275,30.869 ; B8.6@24.275,31.254 B8.6@24.275,30.869 ; C17.1@24.275,33.34 C17.1@24.282,33.347 ; v1(24.282,32.36) 24.275,32.352 B8.6@24.275,30.869 ; v1@37.599,16.235 37.672,16.235 37.825,16.387 U1.19@39.548,16.387 ; U1.4@43.998,19.837 43.998,20.884 v1@44.247,21.133 ; v1(44.247,21.115) 44.503,20.858 44.503,19.842 U1.3@44.498,19.837 ; U1.1@45.498,19.837 45.498,19.844 45.519,19.864 46.602,19.864 48.088,18.378 U1.46@45.957,18.378 ; U1.37@45.948,13.887 46.765,13.887 46.941,13.71 v1(47.021,13.71) ; U1.43@45.948,16.887 45.957,16.896 46.614,16.896 48.088,18.37
  Top Layer 1 w0.508: R23.1@3.658,33.343 v1(3.658,34.163) ; v1(6.193,28.718) v1(6.193,28.718) 6.192,29.59 R22.1@6.19,29.591 10.386,29.591 C16.1@11.834,31.039 ; R21.1@22.504,33.343 22.507,33.345 24.28,33.345 C17.1@24.282,33.347 ; v1(24.282,32.36) C17.1@24.282,33.347 ; J3.2@25.94,39.014 25.937,39.011 25.937,34.058 R24.2@25.933,34.054 25.912,34.033 25.24,34.033 24.61,33.403 24.338,33.403 C17.1@24.282,33.347 ; R11.2@36.01,11.481 v1(36.932,11.481) ; R25.1@41.935,24.34 41.942,24.334 41.942,23.735 42.823,22.854 v1(42.823,22.829) ; v1(44.247,21.115) 44.247,21.139 44.221,21.165 44.221,21.971 R10.2@44.933,22.682
  Top Layer 1 w0.635: v1(8.661,36.17) 8.668,36.176 J4.2@8.668,39.224 ; v1(17.399,21.844) J5.7@17.399,24.805 ; 48.088,18.37 C10.2@48.844,18.37 ; C10.2@48.851,18.363 C11.2@50.103,18.363 v1(51.099,18.363) ; v1(53.782,19.135) Q1.3@55.474,19.135 60.124,19.135 60.207,19.217 Q2.3@60.207,19.27 60.207,18.254 61.29,17.17 Q3.3@64.033,17.17
  other v1: 37.585,16.227
GND: B1.7 B2.3 B3.3 B4.2 B4.3 B4.4 B4.6 B4.7 B4.10 B5.3 B6.2 B7.1 B7.2 B7.7 B8.2 B9.2 BOOT1.1 C1.2 C2.2 C4.2 C6.2 C9.1 C10.1 C11.1 C12.2 C13.2 C16.2 C17.2 C18.2 C19.2 C20.2 C21.2 C22.2 D2.2 E1.2 J1.1 J2.1 J3.1 J4.1 J5.8 J5.16 J6.A1 J6.A12 J6.B1 J6.B12 J6.S1 J6.S2 J6.S3 J6.S4 Q4.2 Q5.2 Q6.2 R2.2 R3.2 R4.2 R8.2 R9.2 R17.1 R19.1 R28.2 R29.2 R30.2 RESET1.1 U1.49 U2.2 U3.4 | length 109.4
  Top Layer 1 w0.15: E1.2@29.441,18.424 29.441,18.413 v1(32.182,15.672)
  Top Layer 1 w0.305: B7.2@5.297,32.577 6.998,32.577 ; v1(5.918,34.341) 5.297,33.72 B7.1@5.297,33.077 6.498,33.077 6.998,32.577 ; B7.7@9.697,31.577 7.998,31.577 6.998,32.577 ; v1(24.13,27.559) 24.186,27.615 24.491,27.615 24.917,28.042 B8.2@24.917,28.961 ; v1(32.182,15.672) v1@32.182,15.683 ; B4.6@46.65,38.465 46.65,39.734 47.15,40.234 ; 46.967,24.788 47.563,25.383 47.994,25.383 48.042,25.431 B5.3@48.042,25.434 ; B4.7@47.15,38.465 47.15,40.234 ; B4.4@47.15,42.865 47.15,44.075 47.653,44.577 ; B4.3@47.648,42.318 47.648,41.323 ; B4.3@47.65,42.865 47.653,42.868 47.653,44.577 ; C2.2@47.722,45.594 47.653,45.525 47.653,44.577 ; B4.2@48.15,42.865 48.15,41.826 47.648,41.323 ; B4.10@48.65,38.465 48.653,38.463 48.653,37.482 48.819,37.316 v1(48.819,37.236) ; B1.7@49.6,28.863 49.638,28.9 v1(51.1,28.9) ; v1(51.2,26.6) 51.2,26.52 51.547,26.173 B3.3@51.547,25.459 ; Q4.2@52.724,2.962 Q4.2@52.874,2.962 ; v1(53.881,26.115) 54.428,26.115 54.751,25.793 54.751,25.507 B2.3@54.798,25.459 ; U2.2@59.484,34.658 59.492,34.649 59.768,34.649 60.303,34.114 v1(60.303,34.053) ; 47.15,40.234 47.15,40.826 47.648,41.323
  Top Layer 1 w0.508: C16.2@12.754,31.039 v1(13.741,31.039) ; C17.2@24.282,34.267 v1(24.282,35.306) ; v1(26.802,26.365) 26.805,26.369 27.359,26.369 ; R9.2@27.363,29.845 27.359,29.841 27.359,26.369 ; J3.1@27.94,39.014 27.94,35.931 28.248,35.623 ; C6.2@28.248,33.985 28.248,35.623 ; RESET1.1@29.238,26.365 27.356,26.365 27.359,26.369 ; v1(29.265,35.626) 29.262,35.623 28.248,35.623 ; v1(29.769,32.131) 29.782,32.118 31.097,32.118 B6.2@31.11,32.106 ; v1(34.519,3.632) U3.4@35.959,3.632 ; C9.1@35.815,23.671 35.823,23.664 37.001,23.664 v1(37.008,23.657) ; C12.2@36.045,12.802 v1(36.932,12.802) ; C4.2@36.325,31.14 v1(37.313,31.14) ; v1(38.608,9.779) C22.2@39.647,9.779 ; B9.2@45.738,25.248 45.789,25.248 45.859,25.178 46.577,25.178 46.967,24.788 46.967,21.44 v1(46.965,21.438) ; J1.1@46.101,48.006 C1.2@46.101,45.596 46.102,45.594 C2.2@47.722,45.594 ; v1(46.203,1.676) 46.227,1.676 46.579,2.028 47.445,2.028 Q6.2@47.591,2.174 ; C13.2@46.253,22.672 46.309,22.616 46.309,22.093 v1@46.947,21.455 ; C10.1@48.844,17.45 48.848,17.446 50.1,17.446 C11.1@50.103,17.443 50.107,17.446 51.101,17.446 v1(51.105,17.45) ; Q5.2@50.453,9.942 50.458,9.937 51.709,9.937 v1(51.714,9.931) ; v1(51.184,36.243) 51.188,36.248 52.243,36.248 R2.2@52.248,36.253 ; v1(51.598,2.956) 51.601,2.959 52.871,2.959 Q4.2@52.874,2.962 ; R2.2@52.255,36.261 52.255,36.245 52.269,36.232 52.704,36.232 52.85,36.086 R28.2@53.467,36.086 C21.2@54.569,36.086 ; R19.1@53.289,49.066 R17.1@55.143,49.066 55.147,49.069 56.257,49.069 v1(56.261,49.073) ; R29.2@58.191,42.552 v1(58.191,41.478) 59.624,41.478 59.805,41.659 J6.S4@59.805,41.667 59.805,41.829 59.986,42.01 61.128,42.01 J6.B1@61.155,42.037 J6.A12@61.155,40.687 J6.A12@61.172,40.67 ; v1(58.598,45.034) 58.604,45.041 59.799,45.041 J6.S2@59.805,45.047 ; R3.2@59.022,17.043 v1(59.817,17.043) ; v1(60.5,38.1) 60.518,38.082 60.701,38.082 C18.2@61.189,37.595 C19.2@62.459,37.595 62.919,38.055 C20.2@62.919,39.141 ; R30.2@66.312,38.456 66.333,38.435 66.798,38.435 67.082,38.151 v1(67.107,38.151) D2.2@67.107,36.682 D2.2@67.086,36.703 ; R8.2@67.032,20.117 v1(67.996,20.117) R4.2@67.996,19.017 ; J6.A1@67.105,40.687 J6.B12@67.105,42.037 67.132,42.01 68.274,42.01 J6.S3@68.455,41.829 ; v1(68.453,39.675) 68.454,39.676 68.454,41.666 J6.S3@68.455,41.667 J6.S3@68.455,41.829 ; J6.S1@68.455,45.047 J6.S3@68.455,41.829
  Top Layer 1 w0.635: v1(10.668,36.17) J4.1@10.668,39.224 ; v1(23.901,3.378) 24.67,2.609 26.587,2.609 BOOT1.1@26.799,2.821
  other v2: 40.548,14.437 41.648,14.437 42.748,14.437 43.848,14.437 44.948,14.437 40.548,15.537 41.648,15.537 42.748,15.537 43.848,15.537 44.948,15.537 40.548,16.637 41.648,16.637 42.748,16.637 43.848,16.637 44.948,16.637 40.548,17.737 41.648,17.737 42.748,17.737 43.848,17.737 44.948,17.737 40.548,18.837 41.648,18.837 42.748,18.837 43.848,18.837 44.948,18.837
NetB1_1: B1.1 B1.3 B1.5 B1.14 B2.5 B3.5 B5.5 Q1.2 Q2.2 Q3.2 Q-1.1 Q-1.3 Q-3.1 Q-3.3 R1.2 R2.1 R3.1 R4.1 R8.1 | length 81
  Top Layer 1 w0.305: B1.1@45.7,28.863 45.7,32.842 ; B1.3@47,28.863 47,31.542 ; B5.5@49.342,23.334 49.342,22.315 49.68,21.977 50.363,21.977 v1(50.419,21.92) ; v1(50.419,25.349) 50.421,25.352 50.421,26.25 49.595,27.076 48.947,27.076 48.373,27.651 48.373,28.79 B1.5@48.3,28.863 48.3,30.242 47,31.542 ; R2.1@52.248,37.153 50.336,37.153 49.352,36.17 46.126,36.17 45.7,35.744 B1.14@45.7,34.739 45.7,32.842 ; B3.5@52.847,23.359 52.847,22.413 v1(53.34,21.92) ; v1(56.125,21.904) 56.112,21.917 56.112,23.346 B2.5@56.098,23.359 56.837,23.359 58.141,24.663 59.234,24.663 59.258,24.687 Q-3.3@59.26,24.689 ; 45.7,32.842 47,31.542
  Top Layer 1 w0.508: R2.1@52.248,37.153 52.253,37.147 54.401,37.147 R1.2@54.407,37.142 ; R3.1@58.122,17.043 58.118,17.039 56.428,17.039 Q1.2@56.424,17.035 56.424,16.885 58.602,14.707 66.784,14.707 67.996,15.919 R4.1@67.996,18.117 67.994,18.119 Q3.2@66.133,18.12 Q3.2@66.133,18.12 R8.1@66.132,20.117 ; Q2.2@59.257,21.37 59.258,21.372 Q-3.3@59.258,24.687 ; Q-3.3@59.26,24.689 60.61,24.689 61.335,23.964 61.335,23.739 Q-3.1@61.56,23.739 61.856,23.443 62.591,22.708 Q-1.3@63.832,22.708 63.855,22.685 64.745,22.685 65.601,21.829 66.061,21.829 Q-1.1@66.132,21.758 R8.1@66.132,20.117
  Bottom Layer 1 w0.305: v1(50.419,25.349) v1(50.419,21.92) v1(53.34,21.92) 53.348,21.912 56.117,21.912 v1(56.125,21.904)
NetB1_2: B1.2 B3.2 B5.2 | length 10.2
  Top Layer 1 w0.305: B1.2@46.35,28.863 46.353,28.86 46.353,27.358 47.498,26.213 48.316,26.213 48.644,25.884 48.644,25.482 B5.2@48.692,25.434 48.739,25.386 48.739,24.717 49.124,24.333 51.816,24.333 52.197,24.714 B3.2@52.197,25.459 B3.2@52.175,25.438
NetB1_4: B1.4 B2.2 B5.1 | length 12.2
  Top Layer 1 w0.305: B1.4@47.65,28.863 47.651,27.521 48.683,26.489 49.209,26.489 v1(49.265,26.432) ; v1@49.265,26.467 49.303,26.428 49.303,25.472 B5.1@49.342,25.434 ; v1(53.569,26.797) 54.889,26.797 55.448,26.238 B2.2@55.448,25.459
  Bottom Layer 1 w0.305: v1(49.265,26.432) 50.091,26.432 50.861,27.202 52.119,27.202 52.524,26.797 v1(53.569,26.797)